# Altium PCB Power PCB Ver B.PcbDoc
Units mm, origin at the board's own origin, x right, y up, seen from the top; angles counter-clockwise.
Board outline 74.35 x 72.78 mm, 2 copper layers (Top Copper, Bottom Copper), stack 1.567 mm thick; 38 components, 31 nets, 122 pads, 12 vias.
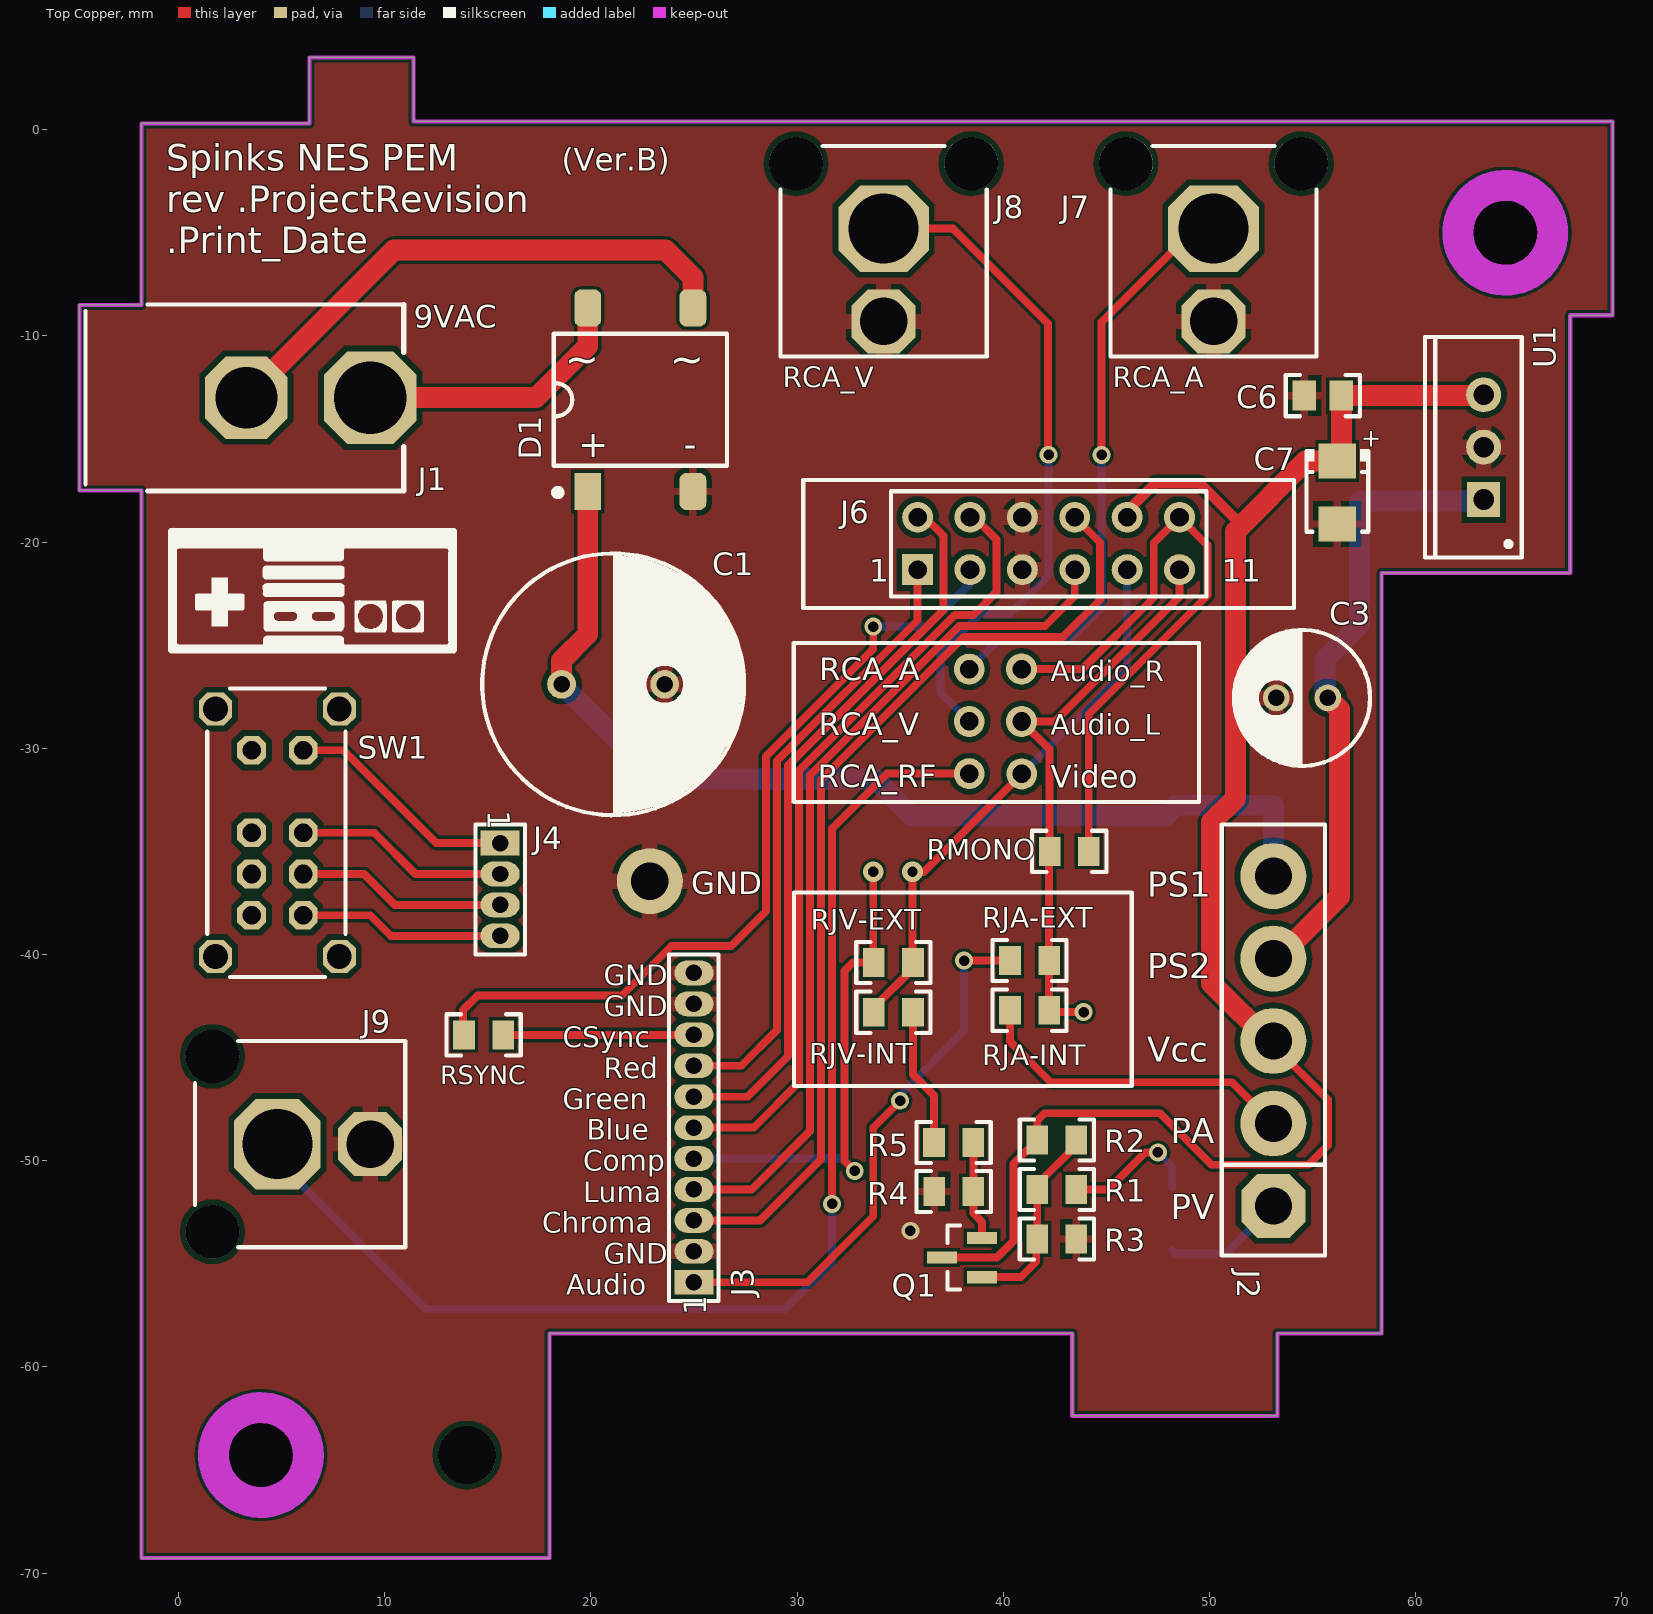
[diagram p0: Top Copper view]
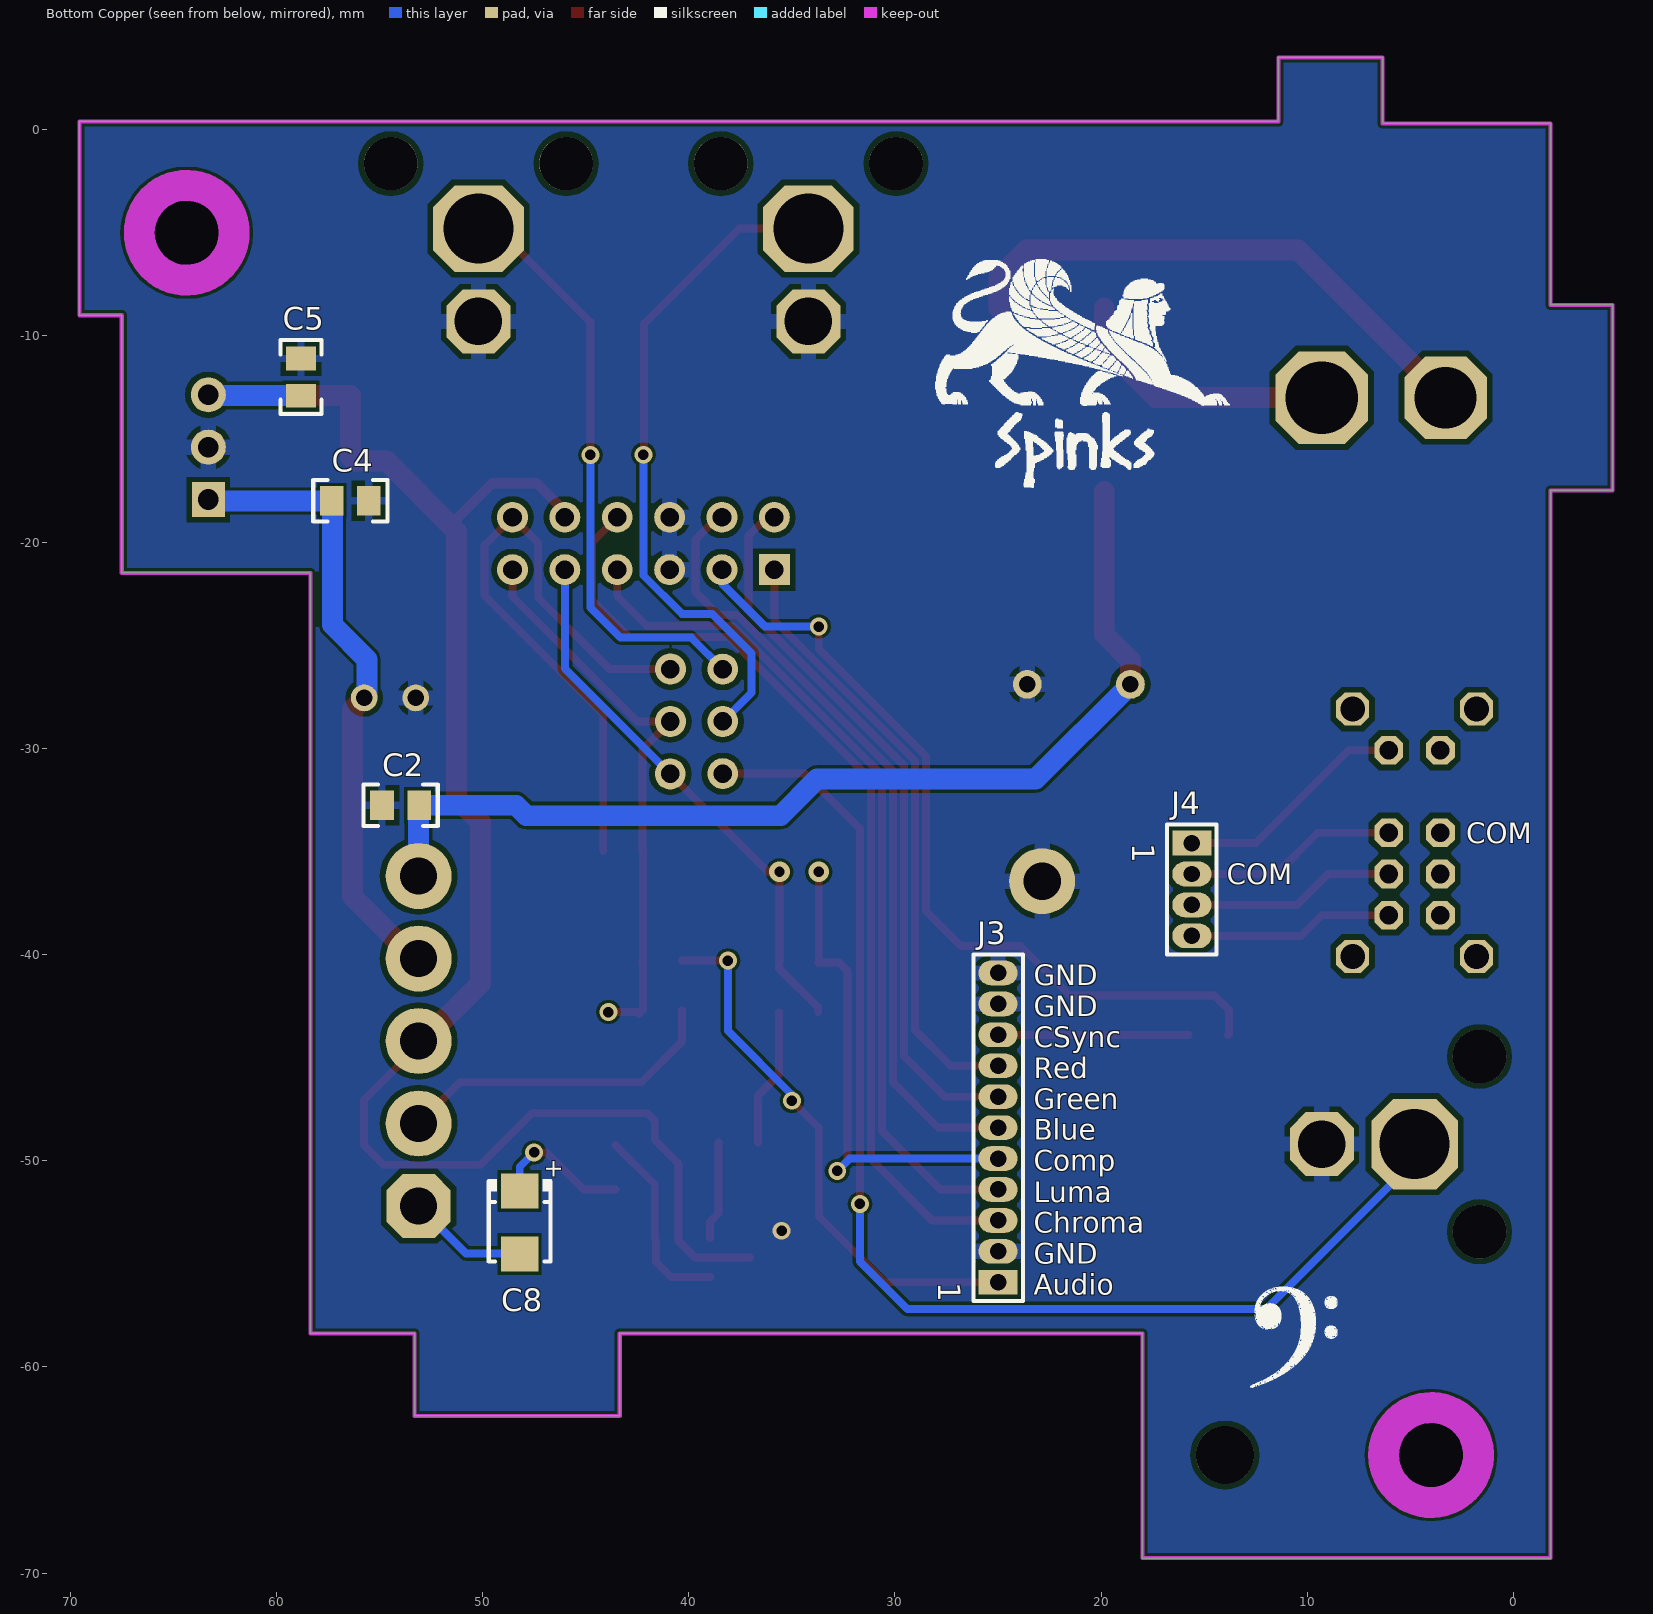
[diagram p1: Bottom Copper view, seen from below]
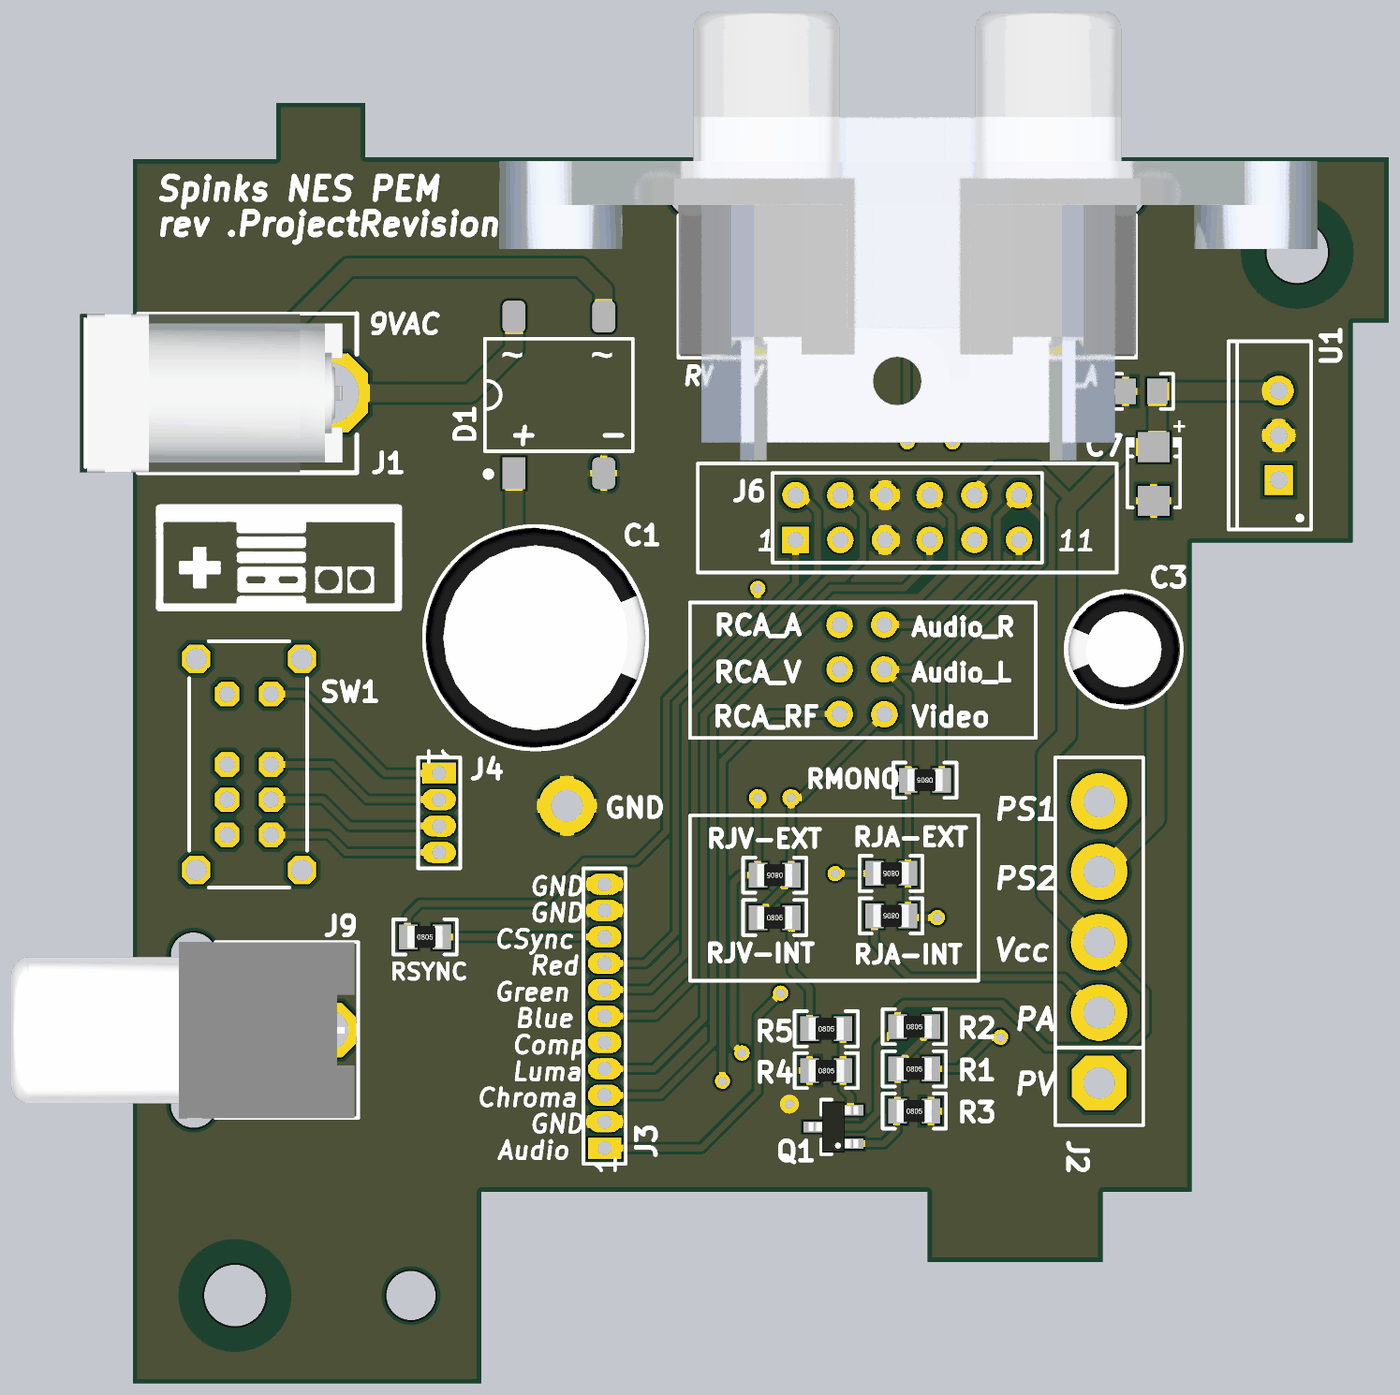
[diagram p2: 3D render of the assembled board from above, using the file's embedded part models]

## Layer stack, top to bottom
Top Solder Mask: solder mask 0.0102, Solder Resist, Dk 3.5
Top Copper: signal copper 0.0343
Dielectric 1: core 1.4986, FR-4, Dk 4.2
Bottom Copper: signal copper 0.0343
Bottom Solder Mask: solder mask 0.0102, Solder Resist, Dk 3.5

## Board outline
-1.8,-69.28 -1.8,-17.5 -4.8,-17.5 -4.8,-8.5 -1.8,-8.5 -1.8,0.3 6.35,0.3 6.35,3.5 11.4,3.5 11.4,0.4 69.55,0.4 69.55,-9 67.5,-9 67.5,-21.5 58.35,-21.5 58.35,-58.38 53.3,-58.38 53.3,-62.38 43.35,-62.38 43.35,-58.38 18,-58.38 18,-69.28

## Design rules (kind name [scope] priority, off if disabled: settings)
Clearance [All] p1: gap=0.152 except(0.267: THPad-Poly THPad-Region)
HoleSize [All] p1: absolutevalues=TRUE maxlimit=2.54 minlimit=0.381 maxpercent=80.000 minpercent=20.000
MinimumAnnularRing Via [IsVia] p1: minimumring=0.127
MinimumAnnularRing "Through Hole" [All] p2: minimumring=0.178
PolygonConnect "Via To Polygon" [IsVia] p1: connectstyle=Direct reliefconductorwidth=0.254 reliefentries=4 polygonreliefangle="90 Angle" airgapwidth=0.254
PolygonConnect "Pad to Polygon" [IsPad AND NOT OnMultiLayer] p2: connectstyle=Relief reliefconductorwidth=0.381 reliefentries=4 polygonreliefangle="90 Angle" airgapwidth=0.254
PolygonConnect "Through Hole to Polygon" [IsPad AND OnMultiLayer] p3: connectstyle=Relief reliefconductorwidth=0.762 reliefentries=4 polygonreliefangle="90 Angle" airgapwidth=0.254
PolygonConnect [All] p4: connectstyle=Relief reliefconductorwidth=0.381 reliefentries=4 polygonreliefangle="90 Angle" airgapwidth=0.254
RoutingVias [All] p1: holewidth=0.381 width=0.762 viastyle="Through Hole" minholewidth=0.381 minwidth=0.635 maxholewidth=1.016 maxwidth=1.626
SolderMaskExpansion [All] p1: expansion=0.102
Width [All] p1: maxlimit=5.08 minlimit=0.152 preferedwidth=0.381
29 further rules are at their usual default settings.

## Components (designator, comment, footprint, x,y, rotation, side; value= is the part's Value field where it differs from the comment)
Audio_L "Wire Pad" WIREPAD-09-15#1 40.889,-28.703 r180 top
Audio_R "Wire Pad" WIREPAD-09-15#1 40.889,-26.16 r90 top
C1 "Cap Aluminum" "TH CAP-12.5X25MM-A1K2" 21.082,-26.9 r0 top
C2 "Cap Ceramic" "CAP 0805_N" 53.975,-32.766 r180 bottom
C3 "Cap Aluminum" "TH CAP-6.3X11MM-A1K2" 54.492,-27.559 r180 top
C4 "Cap Ceramic" "CAP 0805_N" 56.414,-18 r0 bottom
C5 "Cap Ceramic" "CAP 0805_N" 58.804,-12 r270 bottom
C6 "Cap Ceramic" "CAP 0805_N" 55.5,-12.9 r0 top
C7 "Cap Tantalum" "CAP EIA-A (3216) A1K2" 56.2,-17.6 r270 top
C8 "Cap Tantalum" "CAP EIA-A (3216) A1K2" 48.2,-53 r270 bottom
D1 "DF206-ST" DFS4 22.4,-13.1 r90 top
GND "Wire Pad" WIREPAD-09-15#2 22.86,-36.449 r90 top
J1 "PJ-037A" "PWR-JCK-ALT (PJ-037A/B)" 3.3,-13 r0 top locked
J2 "RF Board Connector" "RF BOARD CONNECTOR" 53.1,-52.2 r90 top
J3 "1.27mm Pitch" "RF BOARD MOD INPUTS" 25,-55.9 r90 top
J4 "Header 1x4 1.27mm" "HDR1X4-15MM VERT - L" 15.6,-34.6 r270 top
J6 "Multiout" MULTIOUT-2 42.2,-16.6 r180 top locked
J7 "RCJ-042" "RCA-JCK-1 (RCJ-042-ALT1)" 50.2,-4.8 r180 top locked
J8 "RCJ-042" "RCA-JCK-1 (RCJ-042-ALT1)" 34.2,-4.8 r180 top locked
J9 "RCJ-042" "RCA-JCK-1 (RCJ-042-ALT1)" 4.8,-49.2 r270 top locked
Q1 "Transistor NPN" SOT23-3 38,-54.7 r180 top
R1 "Resistor" "RES 0805_N" 42.6,-51.4 r0 top
R2 "Resistor" "RES 0805_N" 42.6,-49 r0 top
R3 "Resistor" "RES 0805_N" 42.6,-53.8 r0 top
R4 "Resistor" "RES 0805_N" 37.6,-51.5 r0 top
R5 "Resistor" "RES 0805_N" 37.596,-49.123 r0 top
RCA_A "Wire Pad" WIREPAD-09-15#1 38.351,-26.162 r180 top
RCA_RF "Wire Pad" WIREPAD-09-15#1 38.351,-31.233 r90 top
RCA_V "Wire Pad" WIREPAD-09-15#1 38.351,-28.702 r180 top
RJA-EXT "Resistor" "RES 0805_N" 41.275,-40.292 r180 top
RJA-INT "Resistor" "RES 0805_N" 41.275,-42.705 r180 top
RJV-EXT "Resistor" "RES 0805_N" 34.671,-40.392 r180 top
RJV-INT "Resistor" "RES 0805_N" 34.671,-42.805 r0 top
RMONO "Resistor" "RES 0805_N" 43.2,-35 r180 top
RSYNC "Resistor" "RES 0805_N" 14.8,-43.9 r0 top
SW1 "DP3T" "SW-DP3T (EG2319)" 4.8,-34.1 r270 top locked
U1 "L7805CV" TO-220AB 63.3,-15.4 r90 top
Video "Wire Pad" WIREPAD-09-15#1 40.898,-31.247 r180 top

## Footprints (in the part's own frame and the unit in brackets; to place one, negate y for a bottom-side part, rotate by r counter-clockwise, add the part's x,y. Pads: shape width x height; smd on the part's side, far side on the other; paste and mask are expansions set on the pad)
"CAP 0805_N" [mm] "Chip Capacitor, Body 2.0x1.2mm, Height 0.75mm, IPC Medium Density"
  rect 1.15x1.45 smd: 1(-0.9,0) 2(0.9,0)
  silkscreen extent -1.8,-1 1.8,1, body extent -1.1,-0.72 1.1,0.73, height 0.75
"CAP EIA-A (3216) A1K2" [mm] "Molded Capacitor, 2-Leads, Body 3.20x1.60mm, IPC Medium Density"
  rect 1.7x1.8 smd: 1(-1.525,0) 2(1.525,0)
  silkscreen extent -2.1,-1.5 1.9,1.5, body extent -1.7,-0.9 1.7,0.9, height 1.9
DFS4 [mm]
  rect 1.8x1.3 smd: 1(-4.45,2.55)
  rrect50% 1.8x1.3 smd: 2(-4.45,-2.55) 3(4.45,-2.55) 4(4.45,2.55)
  silkscreen extent -4.62,-4.2 3.2,4.2, body extent -3.25,-4.25 3.25,4.25, height 2.6
"HDR1X4-15MM VERT - L" [mm] "Connector; Header; 4 Position; 1.5mm Pitch;Vertical Mount"
  rect 1.2x1.9 hole 0.8: 1(0,0)
  oval 1.2x1.9 hole 0.8: 2(1.5,0) 3(3,0) 4(4.5,0)
  silkscreen extent -0.9,-1.2 5.4,1.2
MULTIOUT-2 [mm] "Retrofixes Mutliout Connector, Panel Mount with Through Holes"
  rect 1.5x1.5 hole 0.9 unplated paste+0: 1(6.35,4.74)
  round 1.5 hole 0.9 unplated paste+0: 2(6.35,2.2) 3(3.81,4.74) 4(3.81,2.2) 5(1.27,4.74) 6(1.27,2.2) 7(-1.27,4.74) 8(-1.27,2.2) 9(-3.81,4.74) 10(-3.81,2.2) 11(-6.35,4.74) 12(-6.35,2.2)
  silkscreen extent -11.9,0.4 11.9,6.6, body extent -23.3,-19.29 23.2,0.21, height 14.55
"PWR-JCK-ALT (PJ-037A/B)" [mm] "Round Holes; DC Power Jack; 2.1mm ID, 6.5mm OD; No Switch;"
  oct 4.5x4.5 hole 3.5: 1(6,0)
  oct 4x4 hole 3: 2(0,0)
  body extent -7.7,-4.5 6.8,4.5, height 11.02
"RCA-JCK-1 (RCJ-042-ALT1)" [mm] "RCA Phono Jack, Right Angle"
  rect 1.8x1.7 on Mech13 paste+0: 0(-4.25,-3.15) 0(4.25,-3.15)
  oct 4.4x4.2 hole 3.4: 1(0,0)
  oct 3.1x3.1 hole 2.3: 2(0,4.5)
  round 2.6 hole 2.6 unplated: MH1(-4.25,-3.15) MH2(4.25,-3.15)
  silkscreen extent -5,-4 5,6.2, body extent -5,-13.5 5,6, height 11.51
"RES 0805_N" [mm] "Chip Resistor, Body 2.0x1.3mm, IPC Medium Density"
  rect 1.05x1.4 smd: 1(-0.95,0) 2(0.95,0)
  silkscreen extent -1.8,-1 1.8,1, body extent -1,-0.62 1,0.63, height 0.62
"RF BOARD CONNECTOR" [mm] "connects the motherboard to the RF/power box"
  oct 3.1x3.1 hole 1.8 unplated paste+0: 1(0,0)
  round 3.2 hole 1.8 unplated paste+0: 2(4,0) 3(8,0) 4(12,0) 5(16,0)
  silkscreen extent -2.4,-2.5 18.5,2.5
"RF BOARD MOD INPUTS" [mm] "Video and audio inputs for the RF Board Mod"
  rect 1.2x1.9 hole 0.8: 1(0,0)
  oval 1.2x1.9 hole 0.8: 2(1.5,0) 3(3,0) 4(4.5,0) 5(6,0) 6(7.5,0) 7(9,0) 8(10.5,0) 9(12,0) 10(13.5,0) 11(15,0)
  silkscreen extent -0.9,-1.2 15.9,1.2
SOT23-3 [mm] "SOT23, 3-Leads, Body 2.90x2.35mm, Pitch 0.95mm, IPC Medium Density"
  rect 1.45x0.6 smd: 1(-0.975,0.95) 2(-0.975,-0.95) 3(0.975,0)
  silkscreen extent 0.1,-1.55 0.7,1.55, body extent -1.4,-1.45 1.4,1.45, height 1.3
"SW-DP3T (EG2319)" [mm] "E-Switch; DP3T Slide Switch; PCB Mount Right Angle"
  oct 1.4x1.4 hole 0.9: 1(-4,-1.25)
  oct 1.4x1.4 hole 0.9 unplated paste+0: 2(0,-1.25) 3(2,-1.25) 4(4,-1.25) 5(-4,1.25) 6(0,1.25) 7(2,1.25) 8(4,1.25)
  oct 1.6x1.6 hole 1.2: MH(-6,3) MH(-6,-3) MH(6,3) MH(6,-3)
  silkscreen extent -7,-3.4 7,3.3, body extent -6.9,-11.75 6.9,3.25, height 8.5
"TH CAP-6.3X11MM-A1K2" [mm] "Aluminum Electrolytic Capacitor, Diameter 6.3mm, Height 11mm, Pitch 2.5mm"
  round 1.3 hole 0.8: 1(-1.25,0) 2(1.25,0)
  silkscreen extent -3.3,-3.3 3.3,3.3, body extent -3.15,-3.15 3.16,3.15, height 11.21
"TH CAP-12.5X25MM-A1K2" [mm] "Aluminum Electrolytic Capacitor, Diameter 12.5mm, Height 25mm, Pitch 5.0mm"
  round 1.4 hole 0.8: 1(-2.5,0) 2(2.5,0)
  silkscreen extent -6.35,-6.35 6.35,6.35, body extent -6.25,-6.25 6.26,6.25, height 25.01
TO-220AB [mm] "TO, Thru-Hole, Vertical, Heatsink Mounted; 3 In-Line Leads; Pitch 2.54 mm"
  rect 1.7x1.6 hole 1: 1(-2.54,0)
  round 1.7 hole 1: 2(0,0) 3(2.54,0)
  silkscreen extent -5.35,-1.85 5.35,2.85, body extent -5.4,-1.9 5.4,2.9, height 19.3
WIREPAD-09-15#1 [mm] "Connector; Through Hole Pad; 0.9mm Inner, 1.5mm Outer"
  round 1.5 hole 0.9: 1(0,0)
WIREPAD-09-15#2 [mm] "Connector; Through Hole Pad; 0.9mm Inner, 1.5mm Outer"
  round 3.2 hole 1.8: 1(0,0)

## Part data
Audio_L Audio_R GND RCA_A RCA_RF RCA_V Video: library part "-Wire Pad", "Wire Pad, 1 Pin, Through Hole, Vertical"
C1: library part "TH-ALUM-8-22-25V (ECA-1EHG222)", "CAP, ALUM, TH, 12.5x25mm, 2200uF, 25V, 20%, Pitch 5.0mm"
C2 C4 C5: library part 0603-X7R-3-10-50V, "CAP, CER, 0805, 10nF, 50V, X7R, 10%"
C3: library part "TH-ALUM-7-10-25V (ECA-1EM101)", "CAP, ALUM, TH, 6.3x11mm, 100uF, 25V, 20%, Pitch 2.5mm"
C6: library part 0805-X7R-4-10-50V, "CAP, CER, 0805, 0.1uF, 50V, X7R, 10%"
C7 C8: library part "1206-TANT-6-10-16V (TAJA106K016RNJ)", "CAP, TANT,  1206, 10uF, 16V, 10%"
D1: library part "Bridge (DF206-ST)", "Full Wave Diode Bridge"
J1: library part "PWR-JCK (PJ-037A)", "2.1mm ID, DC Power Supply Connector, 2 Pin"
J2: "Motherboard Connector to RF/Power Module"
J3: library part "RF Board Mod Input Header", "Video and audio inputs for the RF Board Mod"
J4: library part "Header 1x4 - 1.5mm Vert", "Header, 4 Pin, 1.5mm Pitch, Vertical"
J6: library part "Multiout Connector", "SNES Multiout Connector"
J7 J8 J9: library part "RCA-JCK-1 (RCJ-042)", "RCA Phono Jack, Right Angle"
Q1: library part "BC817 NPN", "General Purpose Transistor, NPN, 3-Pin, B1E2C3"
R1 R2 R3 R4 R5 RJA-EXT RJA-INT RJV-EXT RJV-INT RMONO RSYNC: library part -Resistor, "RES, SMD"
SW1: library part "SW-DP3T (EG2319)", "Dual Pole, Three Throw"
U1: "Fixed 5V Regulator, 1.5A, Through Hole"

## Free pads (board coordinates)
  round 3.5 hole 3.5 unplated paste+0: MH(4,-64.28) MH(64.35,-5)
  round 2.8 hole 2.8 unplated paste+0: MH(14,-64.28)

## Via types
v1: diameter 0.864, hole 0.508, Top Copper to Bottom Copper, 10 vias
v2: diameter 1, hole 0.508, Top Copper to Bottom Copper, 2 vias

## Nets (pads, with @x,y where several pads share a name; then routed paths per layer and width w, separated by ;. In a path a pad name is that pad's centre, name@x,y a point inside that pad or via, vN(x,y) a via of type N, cw(c..) or ccw(c..) an arc to the next point about the centre after c; other vN are vias at no path point)
+5V: C5.2 C6.2 C7.1 J2.3 J6.10 Q1.3 R2.1 U1.3 | length 86.7
  Top Copper w0.381: Q1.3 39.7,-54.7 40.5,-53.9 40.5,-50.15 R2.1 41.65,-48.05 42,-47.7 47.6,-47.7 50.1,-50.2 54.8,-50.2 55.75,-49.25 55.75,-47.05 J2.3@53.1,-44.4
  Top Copper w0.508: J6.10 46.01,-18.506 47.371,-17.145 49.53,-17.145 51.562,-19.177
  Top Copper w1.016: J2.3@53.1,-44.4 50.11,-41.41 50.11,-33.583 51.26,-32.433 51.26,-19.479 54.664,-16.075 C7.1 56.4,-15.875 C6.2 63.26,-12.9 U1.3
  Bottom Copper w1.016: C5.2 63.26,-12.9 U1.3
"AUDIO LEFT": Audio_L.1 J6.11 RJA-EXT.1 RJA-INT.1 RMONO.2 | length 27.8
  Top Copper w0.381: RJA-EXT.1 42.225,-35.025 RMONO.2 42.25,-30.064 Audio_L.1 42.497,-28.703 48.55,-22.65 J6.11 ; RJA-EXT.1@42.25,-40.39 42.225,-40.415 RJA-INT.1 42.42,-42.9 42.52,-42.8 v1(43.9,-42.8)
"AUDIO RIGHT": Audio_R.1 J6.12 RMONO.1 | length 31.4
  Top Copper w0.381: Audio_R.1 43.84,-26.16 47.3,-22.7 47.3,-20.05 J6.12 49.9,-20.15 49.9,-22.6 44.15,-28.35 RMONO.1
BLUE: J3.6 J6.4 | length 38.9
  Top Copper w0.381: J3.6 27.9,-48.4 30.099,-46.201 30.099,-31.092 37.658,-23.533 38.567,-23.533 39.675,-22.425 39.675,-19.875 38.6,-18.8 J6.4 J6.4@38.39,-18.451
CHROMA: J3.3 J6.8 | length 47.5
  Top Copper w0.381: J3.3 28.2,-52.9 31.166,-49.934 31.166,-31.534 38.1,-24.6 42.9,-24.6 44.7,-22.8 44.7,-20.03 J6.8
CSYNC: J6.3 RSYNC.1 | length 40.1
  Top Copper w0.381: RSYNC.1 13.8,-43.85 13.8,-42.7 14.5,-42 21.5,-42 23.9,-39.6 26.8,-39.6 28.499,-37.901 28.499,-30.393 33.7,-25.191 v1(33.7,-24.1)
  Bottom Copper w0.381: v1(33.7,-24.1) 36.3,-24.1 38.39,-22.01 J6.3
GND: C1.2 C2.1 C3.2 C4.1 C5.1 C6.1 C7.2 D1.2 GND.1 J3.2 J3.10 J3.11 J6.5 J6.6 J7.2 J8.2 J9.2 R3.2 R4.1 U1.2
  other v1: 35.5,-53.4
GREEN: J3.7 J6.2 | length 35.4
  Top Copper w0.381: J3.7 27.6,-46.9 29.566,-44.934 29.566,-30.834 37.1,-23.3 37.1,-19.7 36.2,-18.8 J6.2
LUMA: J3.4 J6.7 | length 41.8
  Top Copper w0.381: J3.4 27.8,-51.4 30.632,-48.568 30.632,-31.313 37.879,-24.067 42.033,-24.067 43.47,-22.63 J6.7
NetC1_1: C1.1 C2.2 D1.1 J2.5 | length 50.9
  Top Copper w1.016: C1.1 18.582,-25.741 19.85,-24.473 D1.1
  Bottom Copper w1.016: C1.1 23.178,-31.496 33.782,-31.496 35.56,-33.274 47.879,-33.274 48.387,-32.766 C2.2 53.1,-32.791 J2.5@53.1,-36.4
NetC3_1: C3.1 C4.2 J2.4 U1.1 | length 30.8
  Top Copper w1.016: J2.4@53.1,-40.4 56.3,-37.2 56.3,-28.117 C3.1
  Bottom Copper w1.016: J2.4@53.1,-40.4 J2.4@53.199,-40.4 ; C3.1 55.6,-27.417 55.6,-25.7 57.288,-24.012 57.288,-18.026 C4.2 63.24,-18 U1.1
NetC8_1: C8.1 R1.2 | length 6.7
  Top Copper w0.381: R1.2 45.1,-51.4 46.9,-49.6 v1(47.5,-49.6)
  Bottom Copper w0.381: v1(47.5,-49.6) 48.2,-50.3 C8.1@48.2,-51.275
NetC8_2: C8.2 J2.1 | length 5.9
  Bottom Copper w0.381: C8.2@48.2,-54.325 48.375,-54.5 50.8,-54.5 J2.1
NetD1_3: D1.3 J1.2 | length 26.6
  Top Copper w1.016: J1.2 10.458,-5.842 23.622,-5.842 24.95,-7.17 D1.3
NetD1_4: D1.4 J1.1 | length 13.4
  Top Copper w1.016: J1.1 17.353,-13 19.85,-10.503 D1.4
NetJ2_2: J2.2 RJA-INT.2 | length 15.9
  Top Copper w0.381: RJA-INT.2 40.325,-44.225 42.3,-46.2 51.1,-46.2 J2.2
NetJ3_1: J3.1 RJA-EXT.2 | length 26.5
  Top Copper w0.381: J3.1 30.5,-55.9 33.7,-52.7 33.7,-48.4 v1(35,-47.1) ; v1(38.1,-40.3) 38.108,-40.292 RJA-EXT.2
  Bottom Copper w0.381: v1(35,-47.1) 35,-46.8 38.1,-43.7 v1(38.1,-40.3)
NetJ3_5: J3.5 RJV-EXT.2 | length 23.9
  Top Copper w0.381: v1(32.8,-50.5) 32.3,-50 32.3,-40.8 32.708,-40.392 RJV-EXT.2 33.7,-40.371 v2(33.7,-36)
  Bottom Copper w0.381: J3.5 32.2,-49.9 v1(32.8,-50.5)
NetJ3_9: J3.9 RSYNC.2 | length 9.3
  Top Copper w0.381: RSYNC.2 J3.9
NetJ4_1: J4.1 SW1.5 | length 11.4
  Top Copper w0.381: SW1.5 8,-30.1 12.5,-34.6 J4.1
NetJ4_2: J4.2 SW1.6 | length 10.4
  Top Copper w0.381: SW1.6 9.5,-34.1 11.5,-36.1 J4.2
NetJ4_3: J4.3 SW1.7 | length 10.3
  Top Copper w0.381: SW1.7 9,-36.1 10.5,-37.6 J4.3 J4.3@15.5,-37.7
NetJ4_4: J4.4 SW1.8 | length 10
  Top Copper w0.381: SW1.8 9.3,-38.1 10.3,-39.1 J4.4
NetJ7_1: J7.1 RCA_A.1 | length 28.8
  Top Copper w0.381: v1@44.734,-15.742 44.773,-15.703 44.773,-9.329 49.302,-4.8 J7.1
  Bottom Copper w0.381: RCA_A.1 39.875,-24.638 43.307,-24.638 44.773,-23.172 v1(44.773,-15.777)
NetJ8_1: J8.1 RCA_V.1 | length 32.8
  Top Copper w0.381: J8.1 37.566,-4.8 42.164,-9.398 42.164,-15.789 v1@42.186,-15.811
  Bottom Copper w0.381: RCA_V.1 36.957,-27.308 36.957,-25.4 38.862,-23.495 40.321,-23.495 42.203,-21.613 v1(42.203,-15.763)
NetJ9_1: J9.1 RCA_RF.1 | length 59.9
  Top Copper w0.381: 31.699,-51.599 31.699,-33.901 34.367,-31.233 RCA_RF.1
  Bottom Copper w0.381: J9.1 4.8,-50 12,-57.2 29.4,-57.2 31.7,-54.9 v1(31.7,-52.1)
NetQ1_1: Q1.1 R1.1 R2.2 R3.1 | length 9.1
  Top Copper w0.381: Q1.1 40.85,-55.65 41.6,-54.9 R3.1@41.6,-53.85 ; R3.1 R1.1 ; R1.1@41.65,-51.15 R2.2@43.55,-49.25
NetQ1_2: Q1.2 R4.2 R5.2 | length 4.8
  Top Copper w0.381: R5.2 38.55,-49.127 R4.2 38.55,-52.55 38.975,-52.975 Q1.2
NetR5_1: R5.1 RJV-INT.2 | length 6.7
  Top Copper w0.381: RJV-INT.2 35.621,-45.821 36.646,-46.846 R5.1
RED: J3.8 J6.1 | length 29.9
  Top Copper w0.381: J3.8 27.3,-45.4 29.032,-43.668 29.032,-30.613 35.85,-23.796 J6.1
"VIDEO OUT": J6.9 RJV-EXT.1 RJV-INT.1 Video.1 | length 26.9
  Top Copper w0.381: RJV-INT.1 33.721,-42.579 35.621,-40.679 RJV-EXT.1 35.6,-40.371 v2(35.6,-36) 36.145,-36 Video.1
  Bottom Copper w0.381: Video.1 46.01,-26.135 J6.9
pads on no net: J7.0 J7.MH1 J7.MH2 J8.0 J8.MH1 J8.MH2 J9.0 J9.MH1 J9.MH2 SW1.1 SW1.2 SW1.3 SW1.4 SW1.MH

## Polygon pours and split planes (outlines as drawn)
GND on Top Copper "Top Ground Plane" (solid, pour order 0): -1.8,-69.28 18,-69.28 18,-58.38 43.35,-58.38 43.35,-62.38 53.3,-62.38 53.3,-58.38 58.35,-58.38 58.35,-21.5 67.5,-21.5 67.5,-9 69.55,-9 69.55,0.3 11.4,0.3 11.4,3.5 6.35,3.5 6.35,0.3 -1.8,0.3 -1.8,-8.5 -4.8,-8.5 -4.8,-17.5 -1.8,-17.5
GND on Bottom Copper "Bottom Ground Plane" (solid, pour order 1): -1.8,-69.28 18,-69.28 18,-58.38 43.35,-58.38 43.35,-62.38 53.3,-62.38 53.3,-58.38 58.35,-58.38 58.35,-21.5 67.5,-21.5 67.5,-9 69.55,-9 69.55,0.4 11.4,0.4 11.4,3.5 6.35,3.5 6.35,0.3 -1.8,0.3 -1.8,-8.5 -4.8,-8.5 -4.8,-17.5 -1.8,-17.5

## Keep-outs
Keep-Out Layer:
  circle w1.5: c64.35,-5 r2.3
  circle w1.5: c4,-64.28 r2.3
  lines w0.2: -4.8,-17.5 -1.8,-17.5 -1.8,-69.28 18,-69.28 18,-58.38 26.156,-58.38 43.35,-58.38 43.35,-62.38 53.3,-62.38 53.3,-58.38 58.35,-58.38 58.35,-21.5 67.5,-21.5 67.5,-9 69.55,-9 69.55,0.4 11.4,0.4 11.4,3.5 6.35,3.5 6.35,0.3 -1.8,0.3 -1.8,-8.5 -4.8,-8.5 -4.8,-17.5

## Silkscreen, mask and mechanical layers (free items; w line width, h text height)
Top Silkscreen:
  drawing of 20 lines, arcs and shapes, not listed
  text "Spinks NES PEM" at -0.6,-2 h1.3
  text "(Ver.B)" at 18.6,-2 h1.1
  text "rev .ProjectRevision" at -0.6,-4 h1.3
  text ".Print_Date" at -0.6,-6 h1.3
  text "9VAC" at 11.4,-9.6 h1.1
  text "RCA_V" at 29.3,-12.5 h1
  text "RCA_A" at 45.3,-12.5 h1
  text "PS1" at 46.99,-37.211 h1.2
  text "PS2" at 46.99,-41.148 h1.2
  text "GND" at 20.633,-41.5 h1
  text "GND" at 20.633,-43 h1
  text "CSync" at 18.633,-44.5 h1
  text "Vcc" at 46.99,-45.212 h1.2
  text "Red" at 20.633,-46 h1
  text "Green" at 18.633,-47.5 h1
  text "Blue" at 19.8,-49 h1
  text "PA" at 48.133,-49.149 h1.2
  text "Comp" at 19.633,-50.5 h1
  text "Luma" at 19.633,-52.024 h1
  text "PV" at 48.133,-52.832 h1.2
  text "Chroma" at 17.634,-53.5 h1
  text "GND" at 20.633,-55 h1
  text "Audio" at 18.8,-56.5 h1
Bottom Silkscreen:
  drawing of 62 lines, arcs and shapes, not listed
  text "J4" at 16.6,-33.2 h1.1
  text "COM" at 2.3,-34.6 h1
  text "1" at 18.5,-34.6 h1.1 r90
  text "COM" at 13.9,-36.6 h1
  text "J3" at 26,-39.5 h1.1
  text "GND" at 23.266,-41.5 h1
  text "GND" at 23.266,-43 h1
  text "CSync" at 23.266,-44.5 h1
  text "Red" at 23.266,-46 h1
  text "Green" at 23.266,-47.5 h1
  text "Blue" at 23.266,-49 h1
  text "Comp" at 23.266,-50.5 h1
  text "Luma" at 23.266,-52.024 h1
  text "Chroma" at 23.266,-53.5 h1
  text "GND" at 23.266,-55 h1
  text "1" at 27.9,-55.9 h1.1 r90
  text "Audio" at 23.266,-56.5 h1
M1 Board Outline:
  lines w0.2: -4.8,-17.5 -1.8,-17.5 -1.8,-69.28 18,-69.28 18,-58.38 26.156,-58.38 43.35,-58.38 43.35,-62.38 53.3,-62.38 53.3,-58.38 58.35,-58.38 58.35,-21.5 67.5,-21.5 67.5,-9 69.55,-9 69.55,0.4 11.4,0.4 11.4,3.5 6.35,3.5 6.35,0.3 -1.8,0.3 -1.8,-8.5 -4.8,-8.5 -4.8,-17.5
Mechanical 13:
  lines w0.2: -1.8,-58.4 18,-58.4
  lines w0.254: 58.35,-21.5 58.35,0 ; 58.4,-8.98 67.5,-8.98
Mechanical 16:
  lines w0.1: -8.9,-33.6 -9.4,-33.6 -9.4,-38.6 -7.2,-38.6 ; -8.1,-31.6 -8.6,-31.6 -8.6,-36.6 -7.2,-36.6 ; -7.2,-34.6 -7.8,-34.6 -7.8,-29.6 -7.2,-29.6
  text "POS 1" at -7.6,-31.5 h0.3 r270
  text "POS 2" at -8.4,-33.5 h0.3 r270
  text "POS 3" at -9.2,-35.5 h0.3 r270
Drill Drawing:
  circle w0.254: c-4.644,32.42 r0.508
  circle w0.254: c-4.644,32.42 r0.847
  lines w0.254: -5.491,21.837 -3.797,21.837 -4.644,20.144 -5.491,21.837 ; -5.491,23.954 -5.491,24.377 -5.067,24.8 -5.491,25.223 -5.491,25.647 -5.067,25.647 -4.644,25.223 -4.221,25.647 -3.797,25.647 -3.797,25.223 -4.221,24.8 -3.797,24.377 -3.797,23.954 -4.221,23.954 -4.644,24.377 -5.067,23.954 -5.491,23.954 ; -5.491,35.807 -5.067,35.807 -5.067,35.384 -4.221,35.384 -4.221,35.807 -3.797,35.807 -3.797,36.653 -4.221,36.653 -4.221,37.077 -5.067,37.077 -5.067,36.653 -5.491,36.653 -5.491,35.807 ; -5.491,39.194 -3.797,39.194 -3.797,40.887 -5.491,40.887 -5.491,39.194 ; -5.491,46.814 -5.491,47.237 -5.067,47.66 -5.491,48.083 -5.491,48.507 -5.067,48.507 -4.644,48.083 -4.221,48.507 -3.797,48.507 -3.797,48.083 -4.221,47.66 -3.797,47.237 -3.797,46.814 -4.221,46.814 -4.644,47.237 -5.067,46.814 -5.491,46.814 ; -5.491,54.434 -4.644,54.857 -3.797,54.434 -4.221,55.28 -3.797,56.127 -4.644,55.703 -5.491,56.127 -5.067,55.28 -5.491,54.434 ; -5.491,62.054 -4.644,62.477 -3.797,62.054 -4.221,62.9 -3.797,63.747 -4.644,63.323 -5.491,63.747 -5.067,62.9 -5.491,62.054 ; -5.491,66.287 -5.067,66.287 -4.644,65.864 -4.221,66.287 -3.797,66.287 -4.221,66.71 -3.797,67.133 -4.221,67.133 -4.644,67.557 -5.067,67.133 -5.491,67.133 -5.067,66.71 -5.491,66.287 ; -5.491,74.33 -4.644,73.484 -3.797,74.33 -4.644,75.177 -5.491,74.33 ; -5.152,35.976 -4.898,35.976 -4.898,35.722 -4.39,35.722 -4.39,35.976 -4.136,35.976 -4.136,36.484 -4.39,36.484 -4.39,36.738 -4.898,36.738 -4.898,36.484 -5.152,36.484 -5.152,35.976 ; -5.152,39.532 -4.136,39.532 -4.136,40.548 -5.152,40.548 -5.152,39.532 ; -5.152,47.152 -5.152,47.406 -4.898,47.66 -5.152,47.914 -5.152,48.168 -4.898,48.168 -4.644,47.914 -4.39,48.168 -4.136,48.168 -4.136,47.914 -4.39,47.66 -4.136,47.406 -4.136,47.152 -4.39,47.152 -4.644,47.406 -4.898,47.152 -5.152,47.152 ; -5.152,54.772 -4.644,55.026 -4.136,54.772 -4.39,55.28 -4.136,55.788 -4.644,55.534 -5.152,55.788 -4.898,55.28 -5.152,54.772
  lines w0.381: -7.01,19.001 116.453,19.001 ; -7.01,76.151 116.453,76.151 ; 6.983,15.191 6.983,79.961 ; 20.695,15.191 20.695,79.961 ; 49.897,15.191 49.897,79.961 ; 62.746,15.191 62.746,79.961 ; 81.384,15.191 81.384,79.961 ; 96.367,15.191 96.367,79.961 ; -7.01,15.191 116.453,15.191 116.453,79.961 -7.01,79.961 -7.01,15.191
  text "Symbol" at -4.724,77.294 h1.83
  text "Count" at 8.126,77.294 h1.83
  text "Hole Size" at 21.838,77.294 h1.83
  text "Plated" at 51.04,77.294 h1.83
  text "Hole Type" at 63.889,77.294 h1.83
  text "Via/Pad" at 82.527,77.294 h1.83
  text "Pad Shape" at 97.51,77.294 h1.83
  text "1" at 8.126,73.484 h1.52
  text "1.800mm (70.87mil)" at 21.838,73.484 h1.52
  text "PTH" at 51.04,73.484 h1.52
  text "Round" at 63.889,73.484 h1.52
  text "Pad" at 82.527,73.484 h1.52
  text "Rounded" at 97.51,73.484 h1.52
  text "1" at 8.126,69.674 h1.52
  text "2.800mm (110.24mil)" at 21.838,69.674 h1.52
  text "NPTH" at 51.04,69.674 h1.52
  text "Round" at 63.889,69.674 h1.52
  text "Pad" at 82.527,69.674 h1.52
  text "Rounded" at 97.51,69.674 h1.52
  text "E" at -5.462,69.42 h1.69
  text "1" at 8.126,65.864 h1.52
  text "3.000mm (118.11mil)" at 21.838,65.864 h1.52
  text "PTH" at 51.04,65.864 h1.52
  text "Round" at 63.889,65.864 h1.52
  text "Pad" at 82.527,65.864 h1.52
  text "Octagonal" at 97.51,65.864 h1.52
  text "1" at 8.126,62.054 h1.52
  text "3.500mm (137.80mil)" at 21.838,62.054 h1.52
  text "PTH" at 51.04,62.054 h1.52
  text "Round" at 63.889,62.054 h1.52
  text "Pad" at 82.527,62.054 h1.52
  text "Octagonal" at 97.51,62.054 h1.52
  text "2" at 8.126,58.244 h1.52
  text "3.500mm (137.80mil)" at 21.838,58.244 h1.52
  text "NPTH" at 51.04,58.244 h1.52
  text "Round" at 63.889,58.244 h1.52
  text "Pad" at 82.527,58.244 h1.52
  text "Rounded" at 97.51,58.244 h1.52
  text "D" at -5.462,57.99 h1.69
  text "3" at 8.126,54.434 h1.52
  text "1.000mm (39.37mil)" at 21.838,54.434 h1.52
  text "PTH" at 51.04,54.434 h1.52
  text "Round" at 63.889,54.434 h1.52
  text "Pad" at 82.527,54.434 h1.52
  text "(Mixed)" at 97.51,54.434 h1.52
  text "3" at 8.126,50.624 h1.52
  text "2.300mm (90.55mil)" at 21.838,50.624 h1.52
  text "PTH" at 51.04,50.624 h1.52
  text "Round" at 63.889,50.624 h1.52
  text "Pad" at 82.527,50.624 h1.52
  text "Octagonal" at 97.51,50.624 h1.52
  text "A" at -5.462,50.37 h1.69
  text "3" at 8.126,46.814 h1.52
  text "3.400mm (133.86mil)" at 21.838,46.814 h1.52
  text "PTH" at 51.04,46.814 h1.52
  text "Round" at 63.889,46.814 h1.52
  text "Pad" at 82.527,46.814 h1.52
  text "Octagonal" at 97.51,46.814 h1.52
  text "4" at 8.126,43.004 h1.52
  text "1.200mm (47.24mil)" at 21.838,43.004 h1.52
  text "PTH" at 51.04,43.004 h1.52
  text "Round" at 63.889,43.004 h1.52
  text "Pad" at 82.527,43.004 h1.52
  text "Octagonal" at 97.51,43.004 h1.52
  text "F" at -5.462,42.75 h1.69
  text "5" at 8.126,39.194 h1.52
  text "1.800mm (70.87mil)" at 21.838,39.194 h1.52
  text "NPTH" at 51.04,39.194 h1.52
  text "Round" at 63.889,39.194 h1.52
  text "Pad" at 82.527,39.194 h1.52
  text "(Mixed)" at 97.51,39.194 h1.52
  text "6" at 8.126,35.384 h1.52
  text "2.600mm (102.36mil)" at 21.838,35.384 h1.52
  text "NPTH" at 51.04,35.384 h1.52
  text "Round" at 63.889,35.384 h1.52
  text "Pad" at 82.527,35.384 h1.52
  text "Rounded" at 97.51,35.384 h1.52
  text "7" at 8.126,31.574 h1.52
  text "0.900mm (35.43mil)" at 21.838,31.574 h1.52
  text "PTH" at 51.04,31.574 h1.52
  text "Round" at 63.889,31.574 h1.52
  text "Pad" at 82.527,31.574 h1.52
  text "(Mixed)" at 97.51,31.574 h1.52
  text "12" at 8.126,27.764 h1.52
  text "0.508mm (20.00mil)" at 21.838,27.764 h1.52
  text "PTH" at 51.04,27.764 h1.52
  text "Round" at 63.889,27.764 h1.52
  text "Via" at 82.527,27.764 h1.52
  text "Rounded" at 97.51,27.764 h1.52
  text "B" at -5.462,27.51 h1.69
  text "19" at 8.126,23.954 h1.52
  text "0.800mm (31.50mil)" at 21.838,23.954 h1.52
  text "PTH" at 51.04,23.954 h1.52
  text "Round" at 63.889,23.954 h1.52
  text "Pad" at 82.527,23.954 h1.52
  text "(Mixed)" at 97.51,23.954 h1.52
  text "19" at 8.126,20.144 h1.52
  text "0.900mm (35.43mil)" at 21.838,20.144 h1.52
  text "NPTH" at 51.04,20.144 h1.52
  text "Round" at 63.889,20.144 h1.52
  text "Pad" at 82.527,20.144 h1.52
  text "(Mixed)" at 97.51,20.144 h1.52
  text "87 Total" at 8.126,16.334 h1.52

## Text inside footprints (layer, text, board x,y; h text height)
C7: Top Silkscreen "+" at 57.2,-14.5 h1.5 r270
C8: Bottom Silkscreen "+" at 47.2,-49.9 h1.5 r90
D1: Top Silkscreen "~" at 25.5,-10.1 h2.5 r180; Top Silkscreen "+" at 19.4,-15.9 h1.27; Top Silkscreen "-" at 24.5,-15.9 h1.27; Top Silkscreen "~" at 20.4,-10.1 h2.5 r180
J3: Top Silkscreen "1" at 25.6,-57.5 h1.1 r90
J4: Top Silkscreen "1" at 15,-33 h1.1 r270
J6: Top Silkscreen "1" at 33.5,-21.92 h1.1; Top Silkscreen "11" at 50.6,-21.92 h1.1